# Altium PCB led照明铝基板_2021-12-9.pcbdoc
Units mm, origin at the board's own origin, x right, y up, seen from the top; angles counter-clockwise.
Board outline 50 x 50 mm, 2 copper layers (Top Layer, Bottom Layer); 6 components, 18 nets, 15 pads, 0 vias.
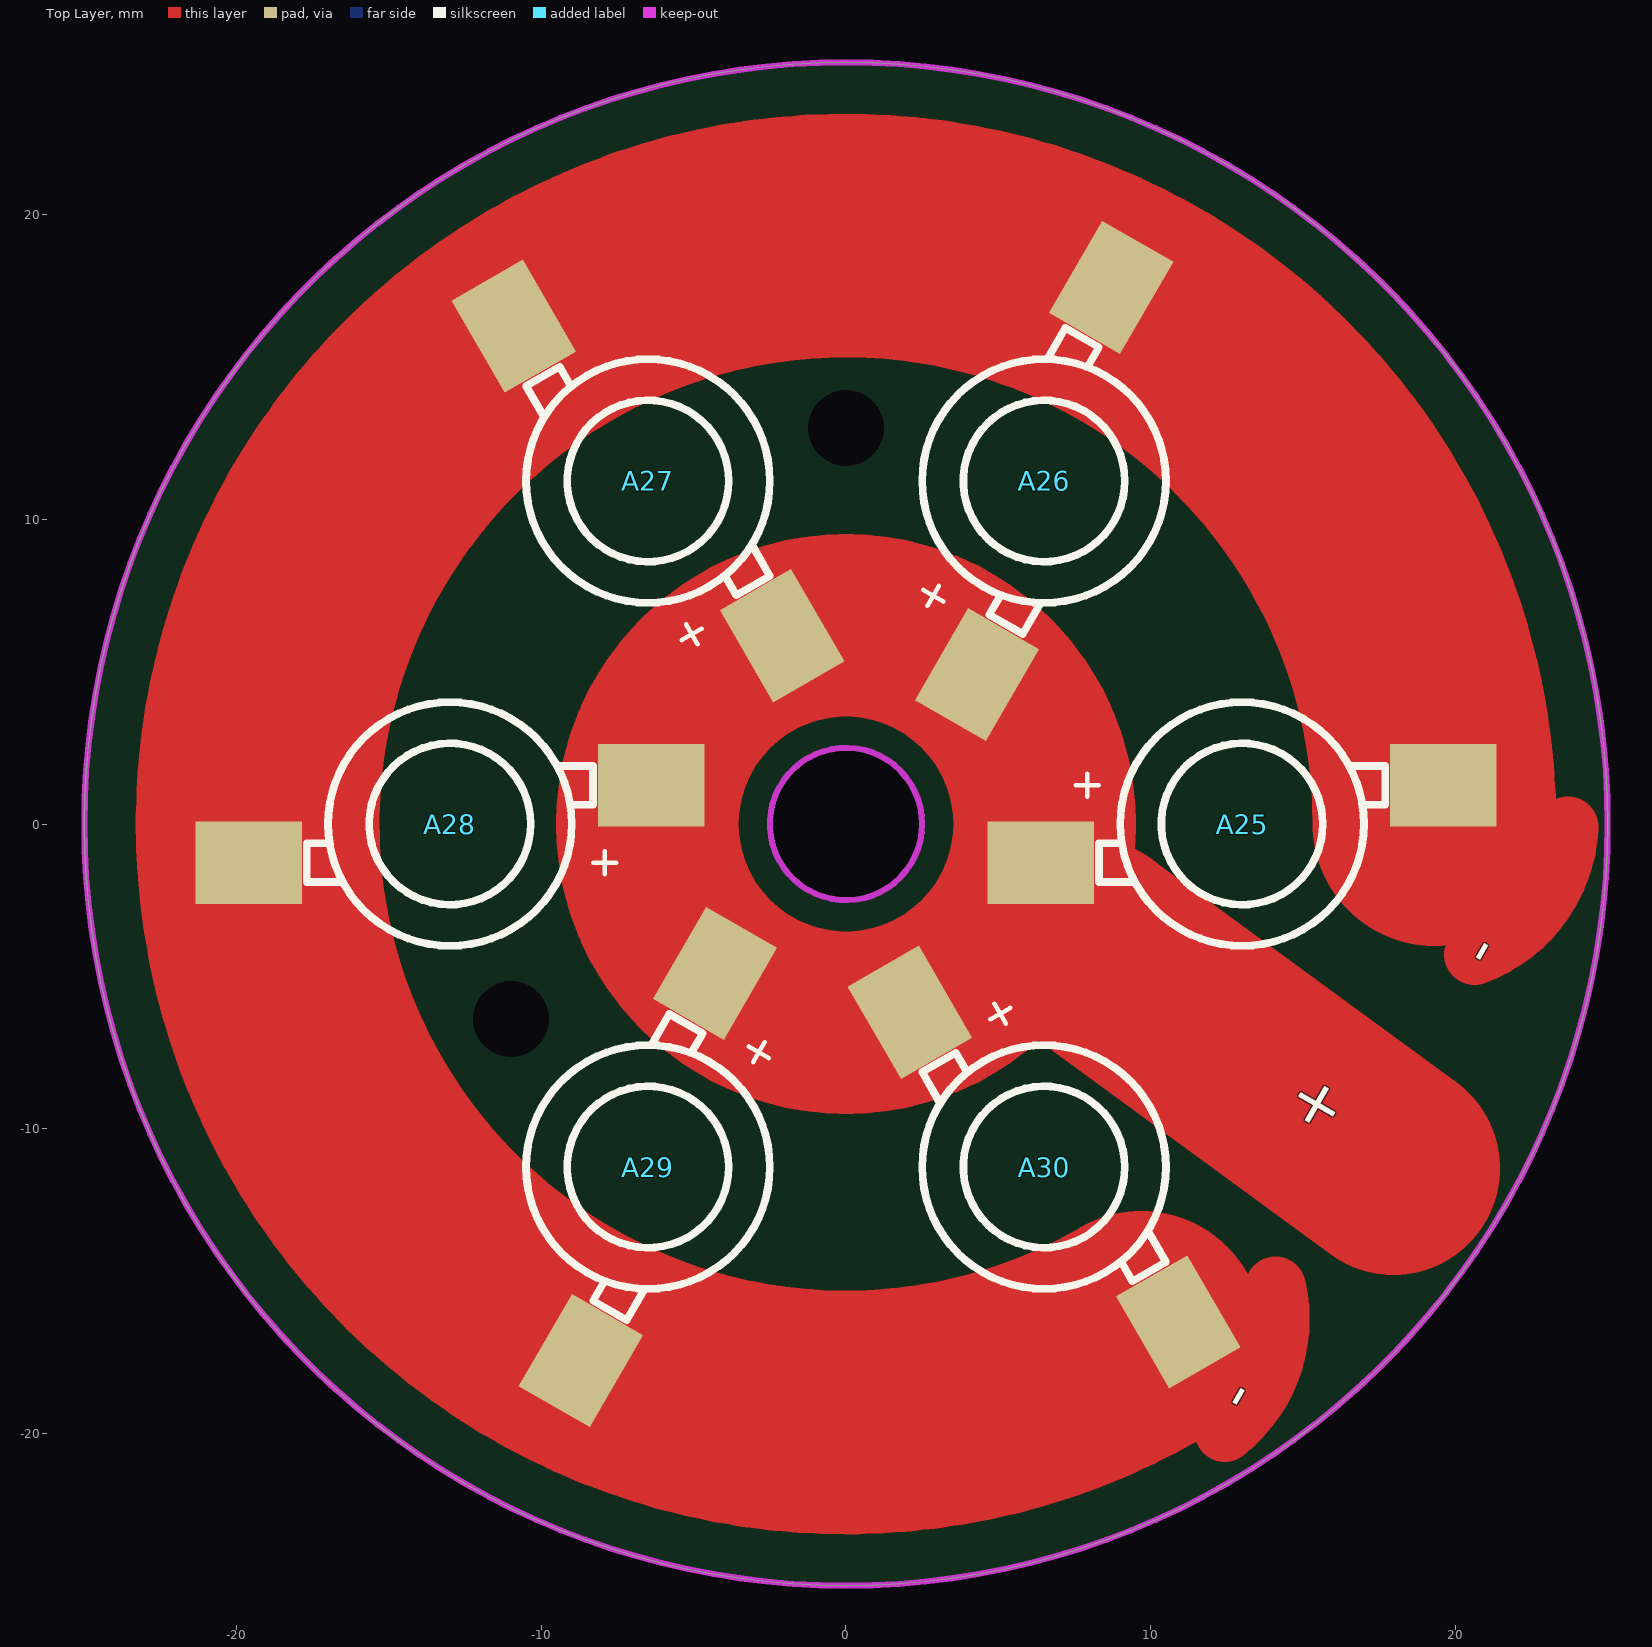
[diagram p0: Top Layer view]
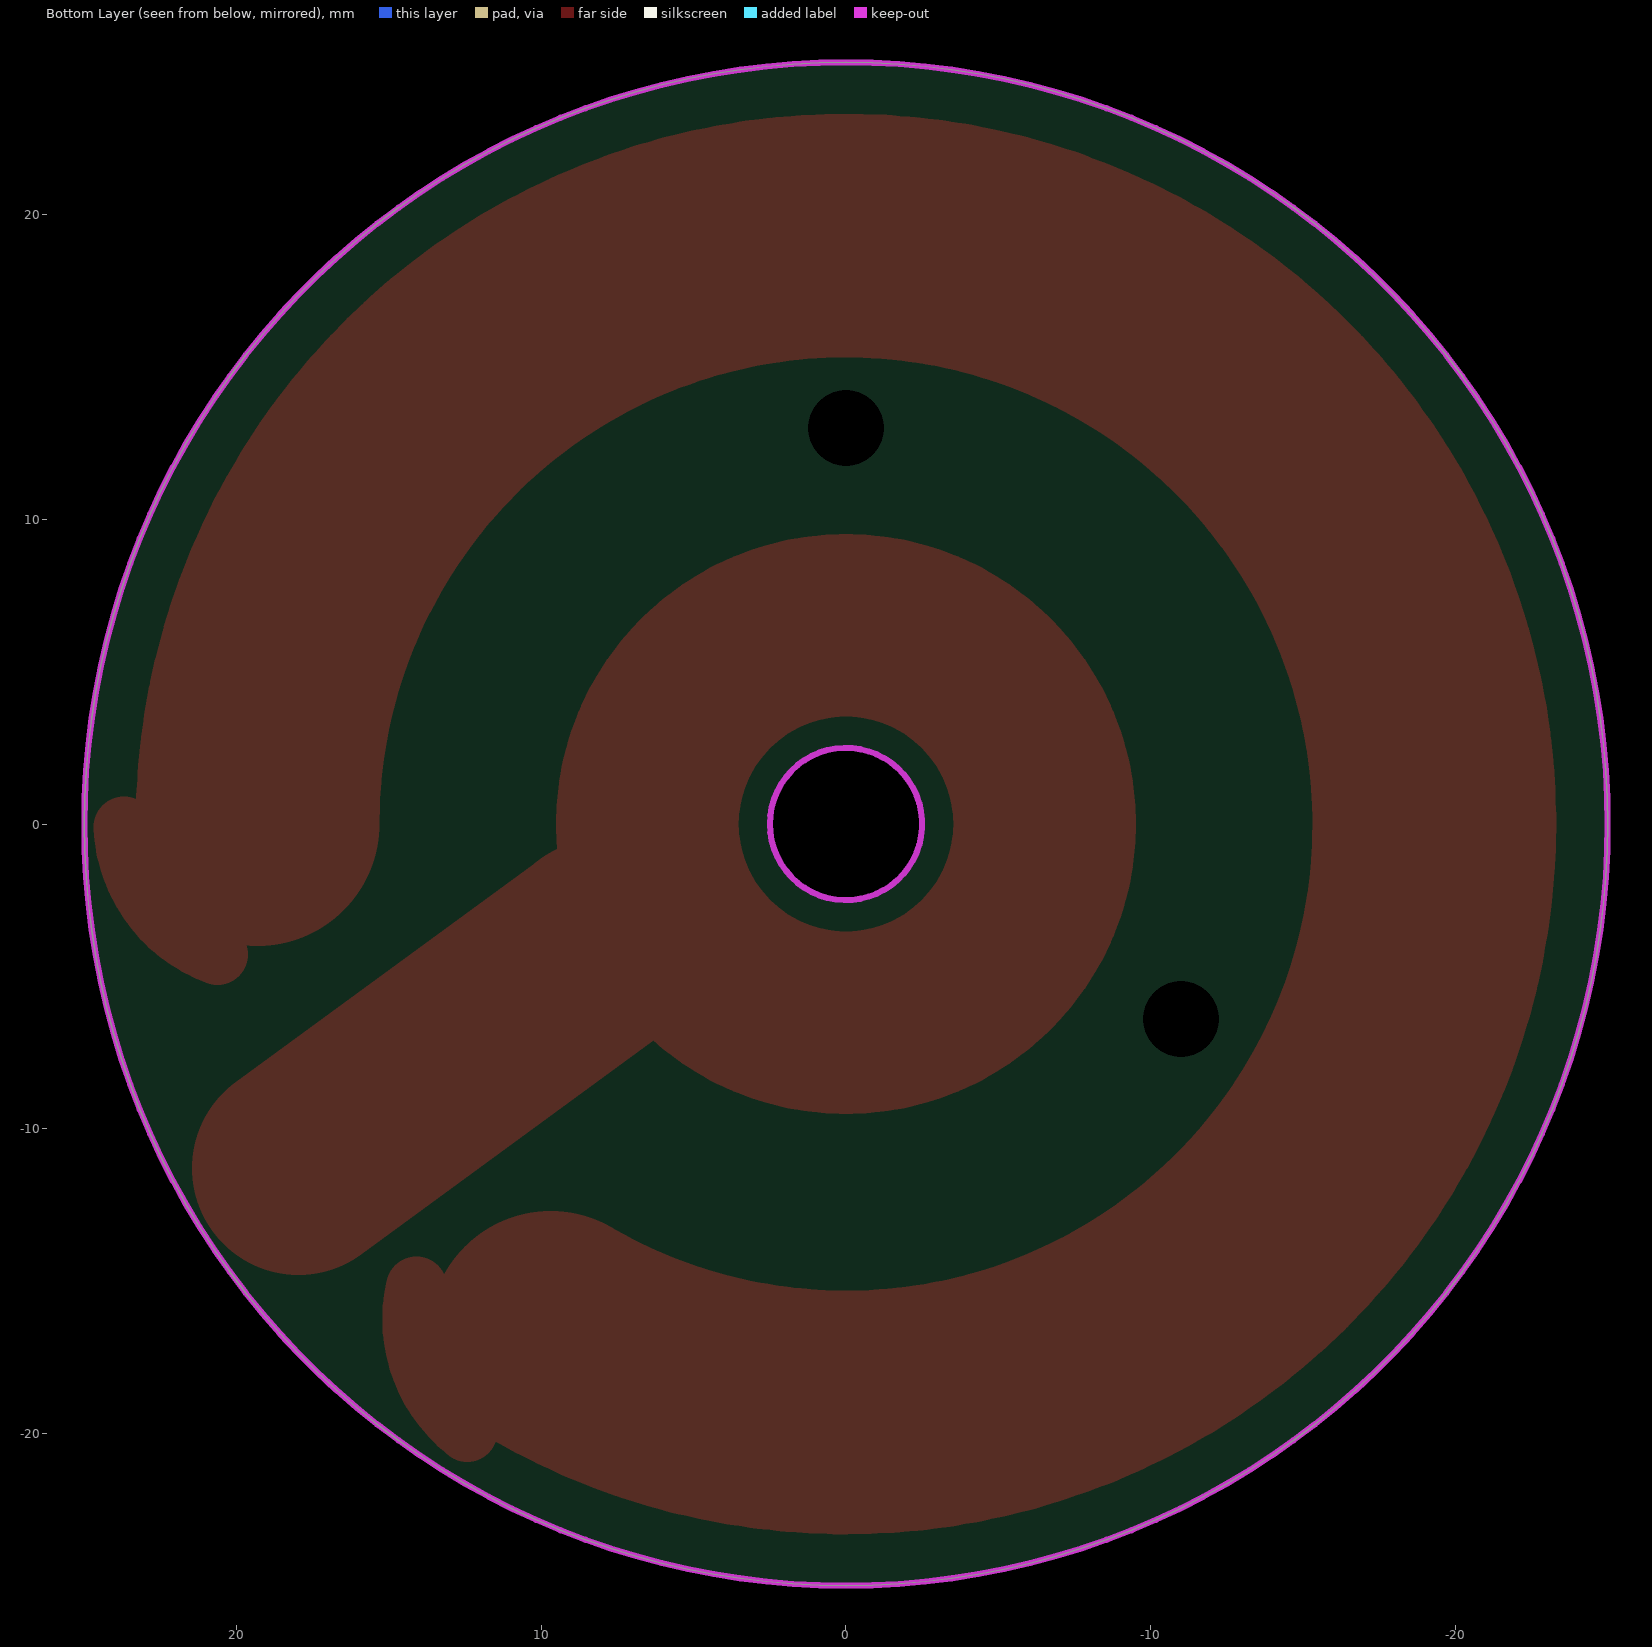
[diagram p1: Bottom Layer view, seen from below]

## Layer stack, top to bottom
Top Solder: solder mask 0.0102, Solder Resist, Dk 3.5
Top Layer: signal copper 0.0356
Dielectric1: dielectric 0.32, FR-4, Dk 4.8
Bottom Layer: signal copper 0.0356
Bottom Solder: solder mask 0.0102, Solder Resist, Dk 3.5

## Board outline
0,-25 cw(c0,0) -25,0 cw(c0,0) 0,25 cw(c0,0) 25,0 cw(c0,0)

## Design rules (kind name [scope] priority, off if disabled: settings)
Clearance [OnLayer('Top Layer') vs OnLayer('Bottom Layer')] p1: gap=0.3 ignorepadtopadclearanceinfootprint=FALSE except(0: Arc-Hole Track-Hole SMDPad-Hole THPad-Hole Via-Hole Fill-Hole Poly-Hole Region-Hole Text-Hole)
ComponentClearance [All] p1 off: gap=0.254 collisioncheckmode=3 verticalgap=0.254 showdistances=FALSE
DiffPairsRouting [All] p1 off: maxlimit=0.254 minlimit=0.254 mostfreqgap=0.254 toplayer_minwidth=0.381 toplayer_maxwidth=0.381 toplayer_prefwidth=0.381 bottomlayer_minwidth=0.381 bottomlayer_maxwidth=0.381 bottomlayer_prefwidth=0.381 maxuncoupledlength=12.7
FabricationTestPointUsage [All] p1 off: valid=0 allowmultiple=FALSE
FabricationTestpoint [(IsPad And (OnTopLayer Or OnBottomLayer))] p1 off: side=3 testpointundercomponent=TRUE minsize=1.016 maxsize=2.54 preferedsize=1.524 minholesize=0 maxholesize=1.016 preferedholesize=0.813 testpointgrid=0.025 allowsidetop=TRUE allowsidebottom=TRUE usegrid=TRUE gridtolerance=0
FanoutControl Fanout_BGA [IsBGA] p1 off: bgadir=Out bgaviamode=Centered fanoutstyle=Auto fanoutdirection=Alternating viagrid=0.025 // Fanout_BGA (Default Rule)
FanoutControl Fanout_LCC [IsLCC] p2 off: bgadir=Out bgaviamode=Centered fanoutstyle=Auto fanoutdirection=Alternating viagrid=0.025 // Fanout_LCC (Default Rule)
FanoutControl Fanout_SOIC [IsSOIC] p3 off: bgadir=Out bgaviamode=Centered fanoutstyle=Auto fanoutdirection=Alternating viagrid=0.025 // Fanout_SOIC (Default Rule)
FanoutControl Fanout_Small [(CompPinCount < 5)] p4 off: bgadir=Out bgaviamode=Centered fanoutstyle=Auto fanoutdirection=OutThenIn viagrid=0.025 // Fanout_Small (Default Rule)
FanoutControl Fanout_Default [All] p5 off: bgadir=Out bgaviamode=Centered fanoutstyle=Auto fanoutdirection=Alternating viagrid=0.025 // Fanout_Default (Default Rule)
Height [All] p1 off: minheight=0 maxheight=25.4 prefheight=12.7
HoleSize [All] p1 off: absolutevalues=TRUE maxlimit=2.54 minlimit=0.025 maxpercent=80.000 minpercent=20.000
HoleToHoleClearance [All] p1 off: gap=0.254 allowstackedmicrovias=TRUE
LayerPairs [All] p1 off: enforce=TRUE
MinimumSolderMaskSliver [All] p1 off: minsoldermaskwidth=0.254
NetAntennae [All] p1 off: netantennaetolerance=0
PasteMaskExpansion [All] p1 off: expansion=0
PolygonConnect [All] p1: connectstyle=Direct reliefconductorwidth=0.254 reliefentries=4 polygonreliefangle="90 Angle" airgapwidth=0.254
RoutingCorners [All] p1: cornerstyle=45-Degree minsetback=0 maxsetback=0
RoutingVias [All] p1: holewidth=0.4 width=0.6 viastyle="Through Hole" minholewidth=0.4 minwidth=0.6 maxholewidth=0.4 maxwidth=0.6
SilkToSilkClearance [All] p1 off: silktosilkclearance=0.254
SilkToSolderMaskClearance [IsPad] p1 off: minsilkscreentomaskgap=0.254 clearancetoexposedcopper=TRUE
SolderMaskExpansion [All] p1 off: expansion=0.102 istentingtop=FALSE
Width [All] p1: maxlimit=2 minlimit=0.5 preferedwidth=0.8
11 further rules are at their usual default settings.

## Components (designator, comment, footprint, x,y, rotation, side; value= is the part's Value field where it differs from the comment)
A25 "Comment" "LED 1W/3W-W" 13,0 r0 top
A26 "Comment" "LED 1W/3W-W" 6.5,11.258 r60 top
A27 "Comment" "LED 1W/3W-W" -6.5,11.258 r120 top
A28 "Comment" "LED 1W/3W-W" -13,0 r180 top
A29 "Comment" "LED 1W/3W-W" -6.5,-11.258 r240 top
A30 "Comment" "LED 1W/3W-W" 6.5,-11.258 r300 top

## Footprints (in the part's own frame and the unit in brackets; to place one, negate y for a bottom-side part, rotate by r counter-clockwise, add the part's x,y. Pads: shape width x height; smd on the part's side, far side on the other; paste and mask are expansions set on the pad)
"LED 1W/3W-W" [mm] "白色，大功率LED                            淘宝ID:黄晶宝石"
  rect 3.5x2.7 smd: 1(-6.604,-1.27) 2(6.604,1.27)
  silkscreen extent -5.46,-4 4.7,4, body extent -7.2,-4 7.2,4, height 5.26

## Free pads (board coordinates)
  round 0 hole 2.5: 0(-11,-6.4) 1(0,13)
  round 0 hole 5: 2(0,0)

## Nets (pads, with @x,y where several pads share a name; then routed paths per layer and width w, separated by ;. In a path a pad name is that pad's centre, name@x,y a point inside that pad or via, vN(x,y) a via of type N, cw(c..) or ccw(c..) an arc to the next point about the centre after c; other vN are vias at no path point)
C3_2: 
C4_1: 
GND: 
Q1_1: 
R1_2: 
R2_2: 
R3_2: 
R4_2: 
R6_1: 
R7_1: 
U1_1: 
U1_2: 
U1_4: 
U1_5: 
U1_6: 
U1_7: 
U1_8: 
VCC: 
pads on no net: A25.1 A25.2 A26.1 A26.2 A27.1 A27.2 A28.1 A28.2 A29.1 A29.2 A30.1 A30.2
copper on no net: | length 165.3
  Top Layer w2: 12.432,-19.933 ccw(c9.538,-16.253) 14.1,-15.2 ; 20.623,-4.287 ccw(c19.023,0.113) 23.7,-0.1
  Top Layer w6: 6.521,0 ccw(c0,0) 6.521,0
  Top Layer w7: 8,-4 17.972,-11.301
  Top Layer w8: 9.693,-16.705 cw(c0,0) 19.313,0

## Keep-outs
Keep-Out Layer:
  circle w0.2: c0,0 r25
  circle w0.2: c0,0 r2.5

## Silkscreen, mask and mechanical layers (free items; w line width, h text height)
Top Overlay:
  text "-" at 21.2,-4.8 h1.52 r60
  text "+" at 15.6,-10.3 h1.52 r60
  text "-" at 13.2,-19.4 h1.52 r60
Top Solder:
  circle w2: c21.7,-1.8 r0.3
  circle w1: c20.1,-12.7 r0.5
  circle w1: c13.9,-15.8 r0.5
  circle w2: c17.8,-11 r0.3
Mechanical 13:
  circle w0.2: c-11,-6.4 r1.3
  circle w0.2: c0,13 r1.3
  circle w0.2: c0,0 r2.506